# Altium PCB OLD_SDC-BSPD-rev2.PcbDoc (part 1 of 2)
Units mm, origin at the board's own origin, x right, y up, seen from the top; angles counter-clockwise.
Board outline 140.5 x 98.9 mm, 2 copper layers (Top Layer, Bottom Layer); 82 components, 50 nets, 263 pads, 54 vias.
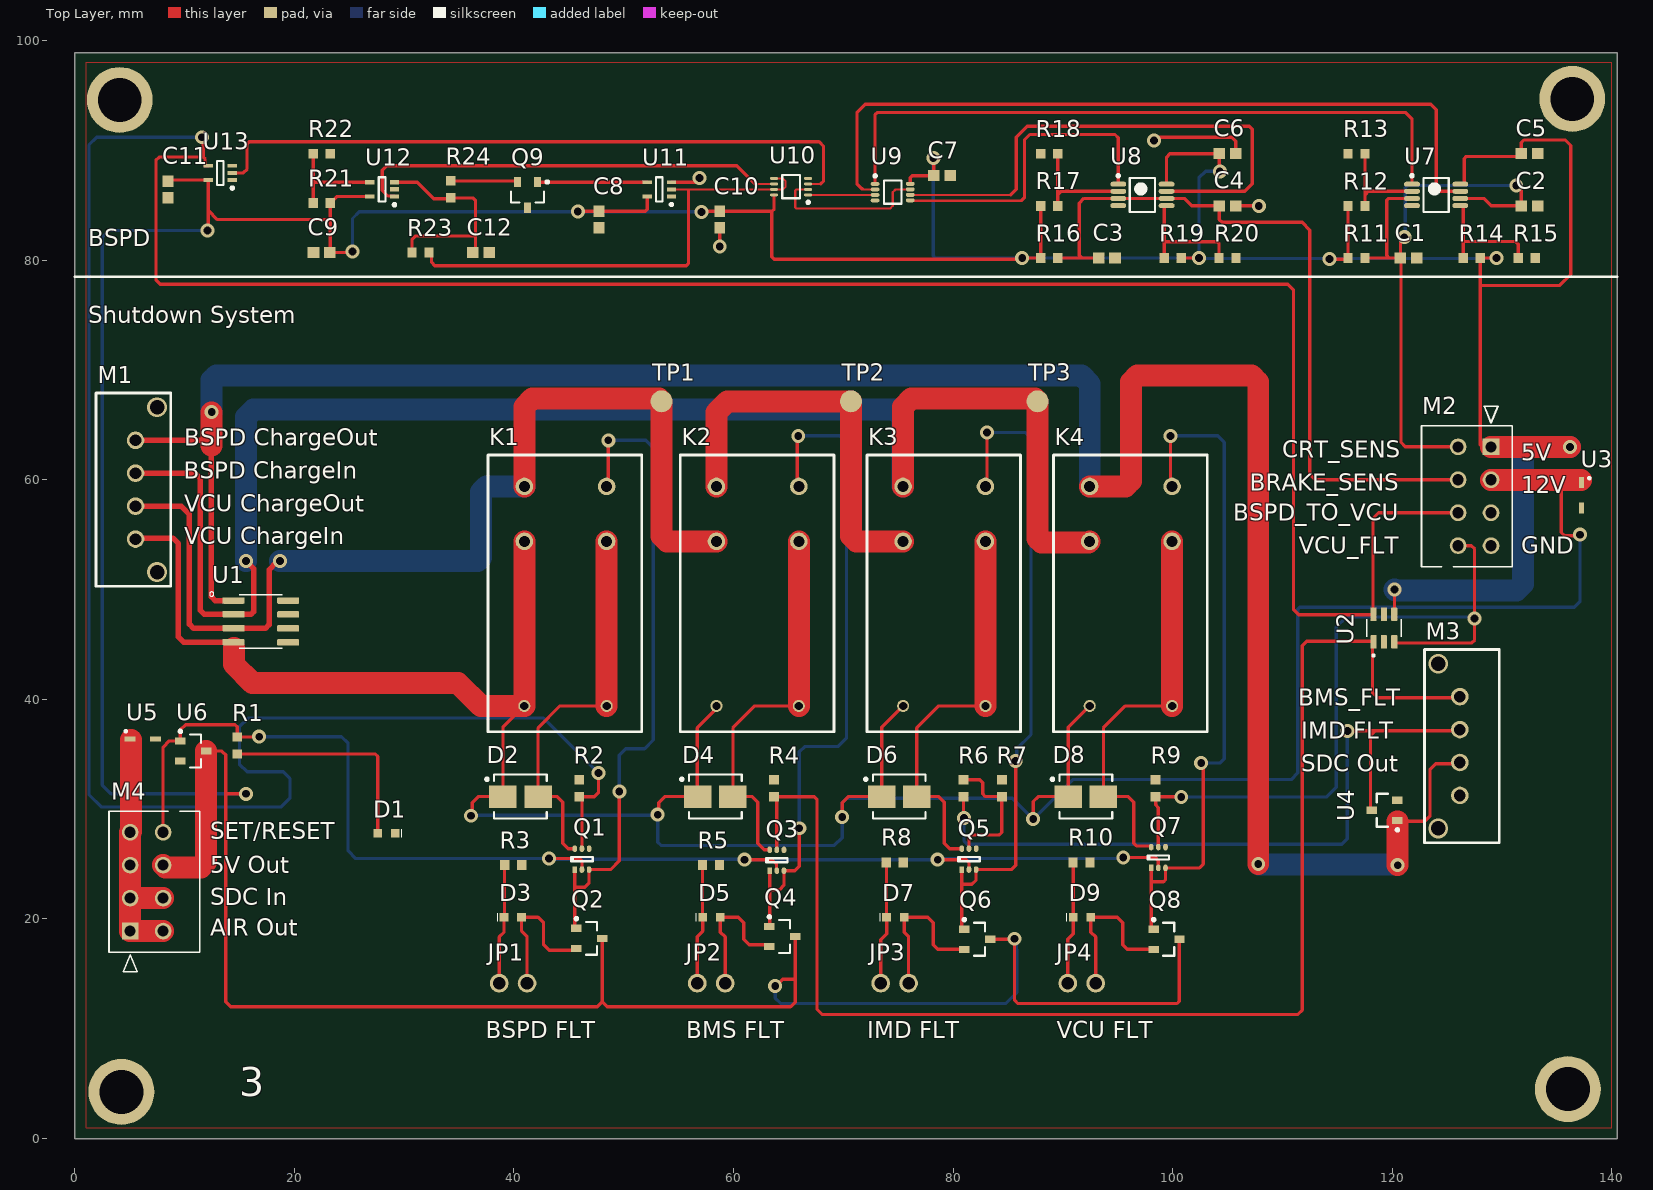
[diagram p0: Top Layer view]
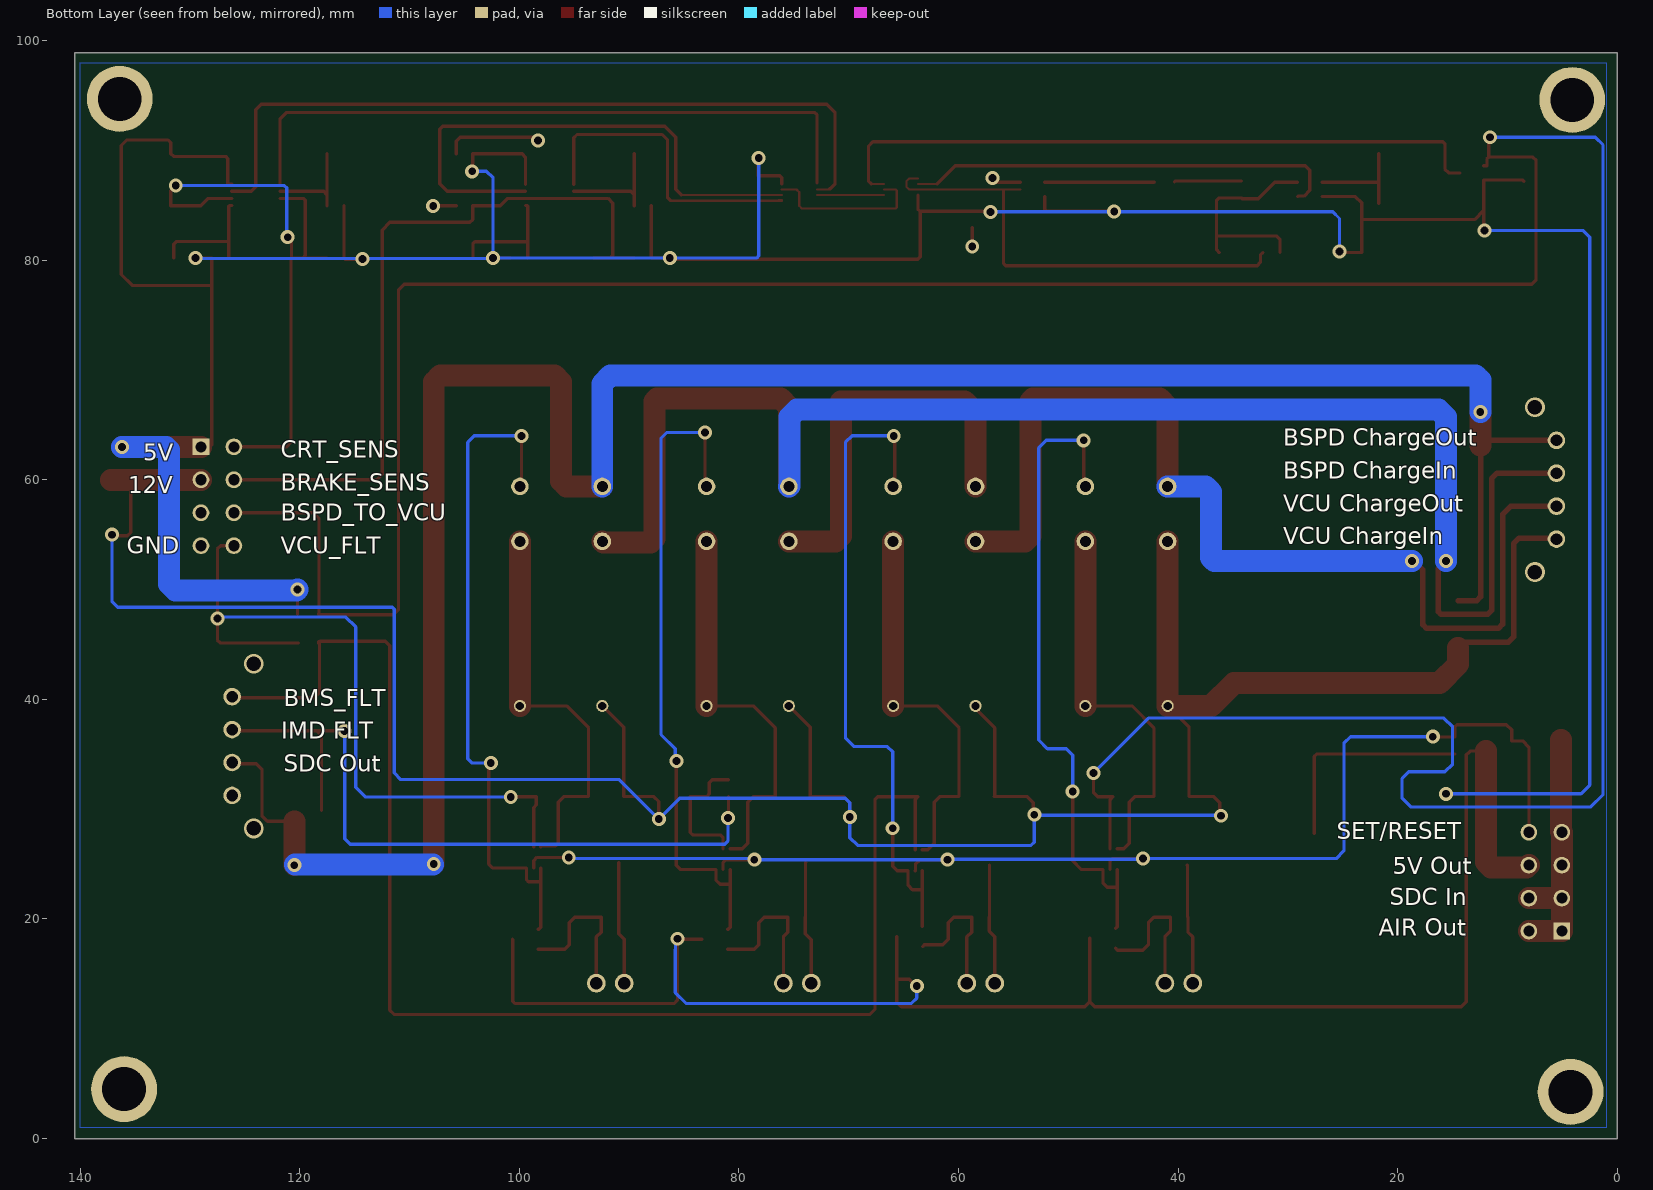
[diagram p1: Bottom Layer view, seen from below]
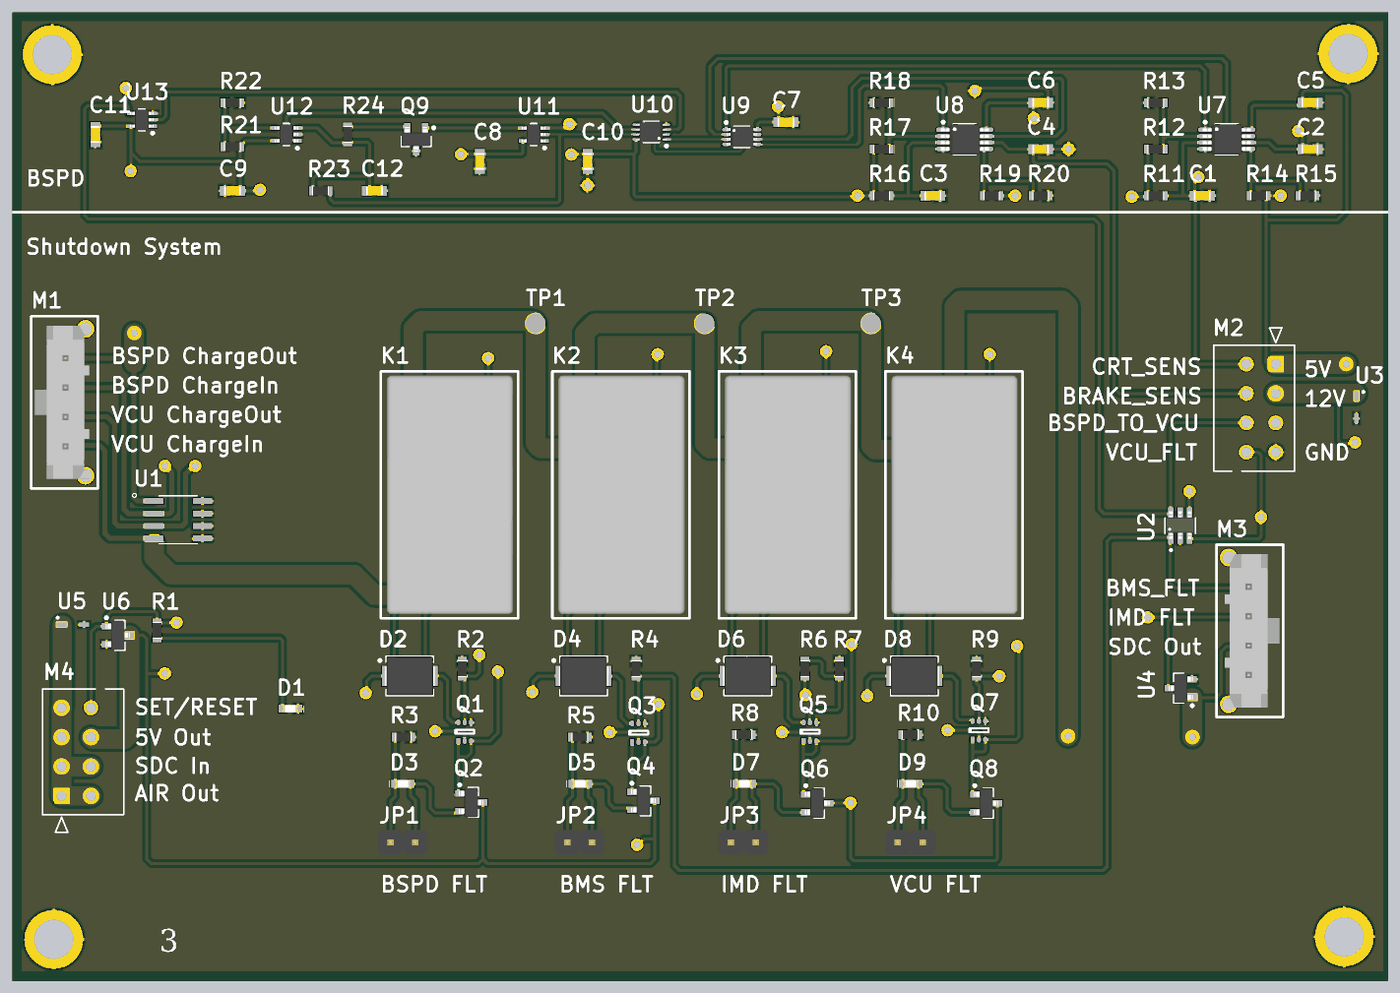
[diagram p2: 3D render of the assembled board from above, using the file's embedded part models]

## Layer stack, top to bottom
Top Solder: solder mask 0.0102, Solder Resist, Dk 3.5
Top Layer: signal copper 0.0356
Dielectric 1: dielectric 0.32, FR-4, Dk 4.8
Bottom Layer: signal copper 0.0356
Bottom Solder: solder mask 0.0102, Solder Resist, Dk 3.5

## Board outline
0,0 140.5,0 140.5,98.9 0,98.9

## Design rules (kind name [scope] priority, off if disabled: settings)
Clearance [All] p1: gap=0.1 ignorepadtopadclearanceinfootprint=FALSE except(0: Arc-Hole Track-Hole SMDPad-Hole THPad-Hole Via-Hole Fill-Hole Poly-Hole Region-Hole Text-Hole; 0.2: Arc-Arc Arc-Track Track-Track; 0.254: Text-Text; 0.3: Arc-Fill Arc-Poly Arc-Region Track-Fill Track-Poly Track-Region)
MinimumSolderMaskSliver [All] p1: minsoldermaskwidth=0.2
PolygonConnect [All] p1: connectstyle=Relief reliefconductorwidth=0.254 reliefentries=4 polygonreliefangle="90 Angle" airgapwidth=0.254
RoomDefinition SDC-rev2 [InComponentClass('SDC-rev2')] p1: confinementstyle=ConfineIn formatcopy=TRUE lockcomponents=FALSE outline -1.5,-4 143.5,-4 143.5,78.5 -1.5,78.5
RoomDefinition U_BSPD-rev2 [InComponentClass('U_BSPD-rev2')] p2: confinementstyle=ConfineIn formatcopy=TRUE lockcomponents=FALSE outline -2.3,79 144.2,79 144.2,103 -2.3,103
RoutingVias [All] p1: holewidth=0.45 width=0.75 viastyle="Through Hole" minholewidth=0.45 minwidth=0.75 maxholewidth=0.45 maxwidth=0.75
SolderMaskExpansion [All] p1: expansion=0.102 istentingtop=FALSE
Width [All] p1: maxlimit=2 minlimit=0.1 preferedwidth=0.3
29 further rules are at their usual default settings.

## Classes and differential pairs
component class U_BSPD-rev2: C1 C2 C3 C4 C5 C6 C7 C8 C9 C10 C11 C12 Q9 R11 R12 R13 R14 R15 R16 R17 R18 R19 R20 R21 R22 R23 R24 U7 U8 U9 U10 U11 U12 U13
component class SDC-rev2: D1 D2 D3 D4 D5 D6 D7 D8 D9 JP1 JP2 JP3 JP4 K1 K2 K3 K4 M1 M2 M3 M4 Q1 Q2 Q3 Q4 Q5 Q6 Q7 Q8 R1 R2 R3 R4 R5 R6 R7 R8 R9 R10 TP1 TP2 TP3 U1 U2 U4 U6

## Components (designator, comment, footprint, x,y, rotation, side; value= is the part's Value field where it differs from the comment)
C1 "100nF" CAP-0603 121.5,80.2 r180 top
C2 "100nF" CAP-0603 132.5,84.95 r180 top
C3 "100nF" CAP-0603 94,80.2 r180 top
C4 "100nF" CAP-0603 105,84.95 r180 top
C5 "100nF" CAP-0603 132.5,89.7 r180 top
C6 "100nF" CAP-0603 105,89.7 r180 top
C7 "100nF" CAP-0603 79,87.7 r0 top
C8 "100nF" CAP-0603 47.75,83.7 r90 top
C9 "100nF" CAP-0603 22.5,80.7 r180 top
C10 "100nF" CAP-0603 58.75,83.7 r90 top
C11 "100nF" CAP-0603 8.5,86.45 r90 top
C12 "15uF" CAP-0603 37,80.7 r180 top
D1 "Yellow" LED-0603 29.6,28.6 r180 top
D2 "100V" DO-214AA 40.6,31.15 r0 top
D3 "Red" LED-0603 38.7,19.35 r0 top
D4 "100V" DO-214AA 58.35,31.15 r0 top
D5 "Red" LED-0603 56.8,19.35 r0 top
D6 "100V" DO-214AA 75.1,31.15 r0 top
D7 "Red" LED-0603 73.55,19.35 r0 top
D8 "100V" DO-214AA 92.1,31.15 r0 top
D9 "Red" LED-0603 90.55,19.35 r0 top
JP1 "732-5315-ND" 2PIN-JP 41.2,14.15 r180 top
JP2 "732-5315-ND" 2PIN-JP 59.24,14.15 r180 top
JP3 "732-5315-ND" 2PIN-JP 75.95,14.15 r180 top
JP4 "732-5315-ND" 2PIN-JP 92.99,14.15 r180 top
K1 "5-1419124-6" "RELAY DPST SDC" 51.15,37.45 r90 top
K2 "5-1419124-6" "RELAY DPST SDC" 68.65,37.45 r90 top
K3 "5-1419124-6" "RELAY DPST SDC" 85.65,37.45 r90 top
K4 "5-1419124-6" "RELAY DPST SDC" 102.65,37.45 r90 top
M1 "0436500428" "4-PIN MOLEX" 5.45,59.1 r90 top
M2 "2068320802" "4X2-PIN MOLEX" 129,63 r90 top
M3 "0436500428" "4-PIN MOLEX" 126.25,35.75 r270 top
M4 "2068320802" "4X2-PIN MOLEX" 5.05,18.9 r270 top
Q1 "DMN63D1LDW" DMN63D1LDW 45.55,24.5 r90 top
Q2 "BSS84" SOT-23-3 46.875,18.235 r0 top
Q3 "DMN63D1LDW" DMN63D1LDW 63.3,24.4 r90 top
Q4 "BSS84" SOT-23-3 64.45,18.4 r0 top
Q5 "DMN63D1LDW" DMN63D1LDW 80.8,24.5 r90 top
Q6 "BSS84" SOT-23-3 82.2,18.15 r0 top
Q7 "DMN63D1LDW" DMN63D1LDW 98.05,24.65 r90 top
Q8 "BSS84" SOT-23-3 99.45,18.15 r0 top
Q9 "BSS138LT3G" SOT-23-3 41.25,85.95 r270 top
R1 "250" RES-0603 14.8,35.8 r270 top
R2 "10K" RES-0603 45.95,31.9 r90 top
R3 "240" RES-0603 39.95,24.9 r180 top
R4 "10K" RES-0603 63.7,31.9 r90 top
R5 "240" RES-0603 57.95,24.9 r180 top
R6 "1K" RES-0603 80.95,31.9 r90 top
R7 "1K" RES-0603 84.45,31.9 r90 top
R8 "240" RES-0603 74.7,25.15 r180 top
R9 "10K" RES-0603 98.45,31.9 r90 top
R10 "240" RES-0603 91.7,25.15 r180 top
R11 "10K" RES-0603 116.75,80.2 r180 top
R12 "1K" RES-0603 116.75,84.95 r180 top
R13 "3K" RES-0603 116.75,89.7 r0 top
R14 "9.1K" RES-0603 127.25,80.2 r0 top
R15 "3K" RES-0603 132.25,80.2 r180 top
R16 "10K" RES-0603 88.75,80.2 r180 top
R17 "1K" RES-0603 88.75,84.95 r180 top
R18 "9.1K" RES-0603 88.75,89.7 r0 top
R19 "7.5K" RES-0603 100,80.2 r0 top
R20 "3K" RES-0603 105,80.2 r180 top
R21 "1.3K" RES-0603 22.5,85.2 r0 top
R22 "2.2K" RES-0603 22.5,89.7 r180 top
R23 "33K" RES-0603 31.5,80.7 r180 top
R24 "499" RES-0603 34.25,86.45 r270 top
TP1 "Testpoint2" TP2 53.45,67.15 r0 top
TP2 "Testpoint2" TP2 70.7,67.15 r0 top
TP3 "Testpoint2" TP2 87.7,67.15 r0 top
U1 "SMDA12.TBT" SMDA12.TBT 16.95,47.1 r0 top
U2 "TPD4E1U06DBVR" TPD4E1U06DBVR 119.25,46.5 r90 top
U3 "AQ12C-01FTG" SOD323 137.25,58.6 r270 top
U4 "AQ12-02HTG" SOT-23-3 119.3,29.9 r180 top
U5 "AQ12C-01FTG" SOD323 6.2,36.4 r0 top
U6 "AQ05-02HTG" SOT-23-3 10.8,35.3 r0 top
U7 "TLV3202AIDGK" TLV3202AIDGK 124,85.95 r0 top
U8 "TLV3202AIDGK" TLV3202AIDGK 97.25,85.95 r0 top
U9 "NL27WZ32USGOSCT-ND" TSSOP50P310X90-8N 74.5,86.2 r0 top
U10 "SN74LVC2G08DCUT" SN74LVC2G08DCU 65.25,86.7 r180 top
U11 "SN74AHC1G04DCK" SN74AHC1G04DCK 53.25,86.45 r180 top
U12 "TLV3201AIDCKR" TLV3201AIDCK 28,86.45 r180 top
U13 "SN74AHC1G04DCK" SN74AHC1G04DCK 13.25,87.95 r180 top

## Footprints (in the part's own frame and the unit in brackets; to place one, negate y for a bottom-side part, rotate by r counter-clockwise, add the part's x,y. Pads: shape width x height; smd on the part's side, far side on the other; paste and mask are expansions set on the pad)
2PIN-JP [mm]
  round 1.7 hole 1.15: 1(0,0) 2(2.54,0)
  body extent -1.24,-1.27 3.84,1.27, height 8.57
"4-PIN MOLEX" [mm]
  round 1.6 hole 1.06: 1(-4.5,-0.09) 2(-1.5,-0.09) 3(1.5,-0.09) 4(4.5,-0.09)
  silkscreen extent -8.8,-3.3 8.8,3.5, body extent -7.82,-2.47 7.83,3.14, height 9.95
"4X2-PIN MOLEX" [mm]
  rect 1.52x1.52 hole 1.016 mask+0.076: 1(0,0)
  round 1.52 hole 1.016 mask+0.076: 2(-3,0) 3(-6,0) 4(-9,0) 5(0,3) 6(-3,3) 7(-6,3) 8(-9,3)
  silkscreen extent -10.92,-1.93 3.71,6.33, body extent 0,0 0.25,0.25, height 0.25
CAP-0603 [mm] "Chip Capacitor, 2-Leads, Body 1.60x0.80mm, IPC Medium Density"
  rect 1.05x1 smd: 1(-0.75,0) 2(0.75,0)
  body extent -0.87,-0.48 0.87,0.48, height 0.9
DMN63D1LDW [mm]
  rect 0.6x0.42 smd: 1(0,0)
  oval 0.6x0.42 smd: 2(0,-0.65) 3(0,-1.3) 4(1.9,-1.3) 5(1.9,-0.65) 6(1.9,0)
  silkscreen extent 0.76,-1.63 1.13,0.33
DO-214AA [mm] "Molded Diode, 2-Leads, Body 4.40x3.62mm, IPC Medium Density"
  rect 2.5x2.05 smd: 1(-1.6,0) 2(1.6,0)
  silkscreen extent -3.17,-2 2.4,2, body extent -2.6,-1.97 2.6,1.97, height 2.41
LED-0603 [mm]
  rect 0.8x0.8 smd: 1(2,0.8) 2(0.4,0.8)
  silkscreen extent -0.18,0.43 -0.18,1.17, body extent 0.4,0.4 2,1.2, height 0.7
"RELAY DPST SDC" [mm]
  round 1.1 hole 0.762: 1(1.95,2.7) 6(1.95,10.2)
  round 1.6 hole 1: 2(16.95,2.7) 3(21.95,2.7) 4(21.95,10.2) 5(16.95,10.2)
  silkscreen extent -0.4,-0.5 24.8,13.5, body extent 0,0 24.4,12.9, height 24.51
RES-0603 [mm] "Chip Resistor, 2-Leads, Body 1.60x0.80mm, IPC Medium Density"
  rect 0.85x0.9 smd: 1(-0.775,0) 2(0.775,0)
  body extent -0.85,-0.45 0.85,0.45, height 0.55
SMDA12.TBT [mm]
  rrect25% 1.98x0.59 smd: 1(-2.485,1.905) 2(-2.485,0.635) 3(-2.485,-0.635) 4(-2.485,-1.905) 5(2.485,-1.905) 6(2.485,-0.635) 7(2.485,0.635) 8(2.485,1.905)
  silkscreen extent -4.66,-2.45 1.95,2.69
SN74AHC1G04DCK [mm] "SOT23, 5-Leads, Body 2.00x2.10mm, Pitch 0.65mm, IPC Medium Density"
  rect 0.85x0.35 smd: 1(-1.1,0.65) 2(-1.1,0) 3(-1.1,-0.65) 4(1.1,-0.65) 5(1.1,0.65)
  silkscreen extent -1.23,-1.1 0.3,1.5, body extent -1.2,-1.07 1.2,1.07, height 1.1
SN74LVC2G08DCU [mm] "TSSOP, 8-Leads, Body 2.00x2.30mm, Pitch 0.50mm, IPC Medium Density"
  oval 0.75x0.25 smd: 1(-1.55,0.75) 2(-1.55,0.25) 3(-1.55,-0.25) 4(-1.55,-0.75) 5(1.55,-0.75) 6(1.55,-0.25) 7(1.55,0.25) 8(1.55,0.75)
  silkscreen extent -1.68,-1.05 0.8,1.55, body extent -1.55,-1.05 1.55,1.05, height 0.9
SOD323 [mm]
  rect 1x0.45 smd: 1(-1.15,0) 2(1.15,0)
  silkscreen extent -1.65,0.6 -1.45,0.8
SOT-23-3 [mm] "SOT23, 3-Leads, Body 2.90x2.40mm, Pitch 0.92mm, IPC Medium Density"
  rect 0.95x0.65 smd: 1(-1.175,0.915) 2(1.175,0) 3(-1.175,-0.915)
  silkscreen extent -1.3,-1.5 0.7,1.91, body extent -1.25,-1.5 1.25,1.5, height 1.1
TLV3201AIDCK [mm] "SOT23, 5-Leads, Body 2.00x2.10mm, Pitch 0.65mm, IPC Medium Density"
  rect 0.85x0.4 smd: 1(-1.125,0.65) 2(-1.125,0) 3(-1.125,-0.65) 4(1.125,-0.65) 5(1.125,0.65)
  silkscreen extent -1.25,-1.1 0.3,1.52, body extent -1.2,-1.07 1.2,1.07, height 1.1
TLV3202AIDGK [mm] "TSOP, 8-Leads, Body 3.00x3.00mm, Pitch 0.65mm, IPC Medium Density"
  oval 1.45x0.45 smd: 1(-2.2,0.975) 2(-2.2,0.325) 3(-2.2,-0.325) 4(-2.2,-0.975) 5(2.2,-0.975) 6(2.2,-0.325) 7(2.2,0.325) 8(2.2,0.975)
  silkscreen extent -2.32,-1.55 1.15,1.87, body extent -2.45,-1.55 2.45,1.55, height 1.1
TP2 [mm]
  round 2 smd: 1(0,0)
TPD4E1U06DBVR [mm]
  rrect25% 1.21x0.58 smd: 1(-1.255,0.95) 2(-1.255,0) 3(-1.255,-0.95) 4(1.255,-0.95) 5(1.255,0) 6(1.255,0.95)
  silkscreen extent -2.6,-1.56 0.8,1.56, body extent -1.35,-1.45 1.45,1.45, height 1.45
TSSOP50P310X90-8N [mm] "TSSOP, 8-Leads, Body 2.00x2.30mm, Pitch 0.50mm, IPC Medium Density"
  oval 0.8x0.35 smd: 1(-1.6,0.75) 2(-1.6,0.25) 3(-1.6,-0.25) 4(-1.6,-0.75) 5(1.6,-0.75) 6(1.6,-0.25) 7(1.6,0.25) 8(1.6,0.75)
  silkscreen extent -1.72,-1.05 0.8,1.6, body extent -1.55,-1.05 1.55,1.05, height 0.9

## Part data
C1 C2 C3 C4 C5 C6 C7 C8 C9 C10 C11: library part CL10B104KB8NNNL, "CAP CER 0.1UF 50V X7R 0603", Capacitance=10uF, Case Code (Imperial)=0805, Case Code (Metric)=2012, Dielectric=X5R, Manufacturer=Samsung, Manufacturer Part Number=CL21A106KPFNNNG, Max Operating Temperature=85°C, Min Operating Temperature=-55°C, Package Quantity=3000, Supplier Part Number 1=1276-6456-1-ND, Tolerance=10%, Voltage=10V, Case/Package=0805, ComponentLink1Description=http://www1.futureelectronics.com/doc/SAMSUNG/CL21A106KPFNNNG.pdf?src-supplier=Future+Electronics, ComponentLink1URL=http://www1.futureelectronics.com/doc/SAMSUNG/CL21A106KPFNNNG.pdf?src-supplier=Future+Electronics, ComponentLink2Description=https://www.verical.com/server-webapp/html/getDatasheet?partID=640497&src-supplier=Verical, ComponentLink2URL=https://www.verical.com/server-webapp/html/getDatasheet?partID=640497&src-supplier=Verical, Depth=1.25mm, Height=1.25mm, Lead Free="Lead Free", Length=2mm, Mount="Surface Mount", Packaging="Tape and Reel", Pricing 1="1=0.15, 10=0.104, 100=0.0489, 500=0.03428, 1000=0.02837 (USD)", Radiation Hardening=No, Stock 1=0, Supplier 1=Digi-Key, Termination=Wraparound, Thickness=0.053inch, Voltage Rating=10V, Width=0.049inch
C12: library part C1608X5R0J156M080AC, "CAP CER 15UF 6.3V X5R 0603"
D1: library part LED-Yellow, "LED YELLOW CLEAR 0603 SMD", Case Code (Imperial)=0603, Case Code (Metric)=1608, Forward Current=30mA, Forward Voltage=2V, Manufacturer="Wurth Electronics", Manufacturer Part Number=150060YS75000, Max Operating Temperature=85°C, Min Operating Temperature=-40°C, Package Quantity=4000, Supplier Part Number 1=732-4981-6-ND, Test Current=20mA, Case/Package=0603, Color=Yellow, ComponentLink1Description=http://katalog.we-online.de/led/datasheet/150060YS75000.pdf?src-supplier=Newark, ComponentLink1URL=http://katalog.we-online.de/led/datasheet/150060YS75000.pdf?src-supplier=Newark, ComponentLink2Description=https://katalog.we-online.de/led/datasheet/150060YS75000.pdf?src-supplier=Digi-Key, ComponentLink2URL=https://katalog.we-online.de/led/datasheet/150060YS75000.pdf?src-supplier=Digi-Key, ComponentLink3Description=http://www.farnell.com/datasheets/1911348.pdf?src-supplier=Element14, ComponentLink3URL=http://www.farnell.com/datasheets/1911348.pdf?src-supplier=Element14, ComponentLink4Description=https://www.distrelec.biz/Web/Downloads/_t/ds/150060YS75000_eng_tds.pdf?mime=application%2Fpdf&src-supplier=Distrelec, ComponentLink4URL=https://www.distrelec.biz/Web/Downloads/_t/ds/150060YS75000_eng_tds.pdf?mime=application%2Fpdf&src-supplier=Distrelec, ComponentLink5Description=http://www.produktinfo.conrad.com/datenblaetter/750000-774999/759432-da-01-en-CHIPLED_0603_W_KL_GELB_150060YS75000.pdf?src-supplier=Conrad, ComponentLink5URL=http://www.produktinfo.conrad.com/datenblaetter/750000-774999/759432-da-01-en-CHIPLED_0603_W_KL_GELB_150060YS75000.pdf?src-supplier=Conrad, Dominant Wavelength=590nm, Height=0.7mm, Length=1.6mm, Lens Style=Clear,Rectangular, Luminous Intensity=120mcd, Mount="Surface Mount", Packaging="Tape and Reel", Pricing 1="1=0.14, 50=0.133, 100=0.114, 500=0.099 (USD)", REACH SVHC=Unknown, Stock 1=78, Supplier 1=Digi-Key, Viewing Angle=140°, Wavelength=590nm, Width=0.8mm
D2 D4 D6 D8: library part Diode-600V-5A, "DIODE GEN PURP 600V 5A SMB", Average Rectified Current=5A, Case/Package=SMB, Manufacturer=MCC, Manufacturer Part Number=SK510B-LTP, Supplier Part Number 1=1655-1530-6-ND, ComponentLink1Description=http://components.arrow.com/part/dataview/49208388S301832N2022?src-supplier=Arrow, ComponentLink1URL=http://components.arrow.com/part/dataview/49208388S301832N2022?src-supplier=Arrow, ComponentLink2Description=http://www.mccsemi.com/up_pdf/SK52B-L-SK520B-L(DO-214AA).pdf?src-supplier=Digi-Key, ComponentLink2URL=http://www.mccsemi.com/up_pdf/SK52B-L-SK520B-L(DO-214AA).pdf?src-supplier=Digi-Key, ComponentLink3Description=http://www.smc-diodes.com/propdf/SD560B%20N1412%20REV.D.pdf?src-supplier=Digi-Key, ComponentLink3URL=http://www.smc-diodes.com/propdf/SD560B%20N1412%20REV.D.pdf?src-supplier=Digi-Key, Max Reverse Voltage (DC)=100V, Mount="Surface Mount", Number of Pins=2, Packaging="Tape and Reel", Pricing 1="1=0.4, 10=0.3, 25=0.2628, 100=0.1427, 250=0.14192, 500=0.11638, 1000=0.08634 (USD)", Stock 1=68219, Supplier 1=Digi-Key
D3 D5 D7 D9: library part LED-Red-Bright, "LED RED CLEAR 0603 SMD", Case Code (Imperial)=0603, Case Code (Metric)=1608, Forward Voltage=2.2V, Lens Color=Clear, Manufacturer=Inolux, Manufacturer Part Number=IN-S63ATR, Supplier Part Number 1=1830-1065-6-ND, Test Current=20mA, Case/Package=0603, Color=Red, ComponentLink1Description=http://www.inolux-corp.com/datasheet/SMDLED/Mono%20Color%20Top%20View/IN-S63AT%20Series_V1.1.pdf?src-supplier=Digi-Key, ComponentLink1URL=http://www.inolux-corp.com/datasheet/SMDLED/Mono%20Color%20Top%20View/IN-S63AT%20Series_V1.1.pdf?src-supplier=Digi-Key, Dominant Wavelength=622nm, Height=0.4mm, Length=1.6mm, Lens Size=0.8mm, Lens Style=Flat, Lens Transparency=Clear, Luminous Intensity=45mcd, Mount="Surface Mount", Packaging="Cut Tape", Pricing 1="1=0.33, 10=0.24, 100=0.1136, 500=0.07576, 1000=0.05934 (USD)", Stock 1=6977, Supplier 1=Digi-Key, Viewing Angle=120°, Width=0.8mm
JP1 JP2 JP3 JP4: library part 2PIN-TEST, "CONN HEADER VERT 2POS 2.54MM"
K1 K2 K3 K4: "General Purpose Relay, Osa Series, Power, Non Latching, Dpst-No, 12 Vdc, 3 A Rohs Compliant: Yes", Coil Current=45mA, Coil Power=600mW, Coil Resistance=270R, Coil Voltage (DC)=12V, Contact Current Rating=3A, Contact Voltage Rating (AC)=240V, Manufacturer="TE Connectivity", Max Operating Temperature=60°C, Min Operating Temperature=-30°C, Package Quantity=1000, Supplier Part Number 1=OSA-SS-212DM3,000-ND, Category=Relays, Coil Type=Non-Latching, ComponentLink1Description=http://www.farnell.com/datasheets/1652820.pdf?src-supplier=Farnell, ComponentLink1URL=http://www.farnell.com/datasheets/1652820.pdf?src-supplier=Farnell, ComponentLink2Description=http://www.farnell.com/cad/1652820.pdf?src-supplier=Element14, ComponentLink2URL=http://www.farnell.com/cad/1652820.pdf?src-supplier=Element14, ComponentLink3Description=http://www.te.com/commerce/DocumentDelivery/DDEController?Action=srchrtrv&DocNm=5-1419124-6&DocType=Customer+Drawing&DocLang=English&src-supplier=Digi-Key, ComponentLink3URL=http://www.te.com/commerce/DocumentDelivery/DDEController?Action=srchrtrv&DocNm=5-1419124-6&DocType=Customer+Drawing&DocLang=English&src-supplier=Digi-Key, Contact Material=Silver, ELV=Compliant, Height=0.976inch, Length=24.4mm, Manufacturer Part Number=5-1419124-6, Mount="Through Hole", Operate Time=20ms, Packaging=Box, Pricing 1="1=2.54, 10=2.385, 25=2.1204, 50=2.0142, 100=1.9083, 250=1.69624, 500=1.59022, 1000=1.48421, 5000=1.4312 (USD)", REACH SVHC=Unknown, Relay Type="General Purpose", Release Time=10ms, Stock 1=2593, Supplier 1=Digi-Key, Termination=PCB, Throw Configuration=DPST, Weight=13g, Width=12.9mm
M1 M3: "4 PIN HDR, 3MM PITCH, 18-30 AWG", Color=Black, Manufacturer=Molex, Max Operating Temperature=105°C, Min Operating Temperature=-40°C, Package Quantity=2040, Supplier Part Number 1=WM10669-ND, Category="Connectors, Interconnects", ComponentLink1Description=http://www.molex.com/pdm_docs/sd/436500428_sd.pdf?src-supplier=Digi-Key, ComponentLink1URL=http://www.molex.com/pdm_docs/sd/436500428_sd.pdf?src-supplier=Digi-Key, ComponentLink2Description=http://www.molex.com/webdocs/datasheets/pdf/en-us/0436500428_PCB_HEADERS.pdf?src-supplier=Avnet, ComponentLink2URL=http://www.molex.com/webdocs/datasheets/pdf/en-us/0436500428_PCB_HEADERS.pdf?src-supplier=Avnet, Connector Type="Male Pin", Contact Material=Brass, Contact Plating=Gold, Depth=5.57mm, Fastening Type=Ramp, Housing Material=Polymer, Length=15.65mm, Manufacturer Part Number=0436500428, Mount="Through Hole", Number of Contacts=4, Number of Ports=1, Number of Positions=4, Number of Rows=1, Number of Terminals=4, Orientation=Straight, Packaging=Tray, Pitch=3mm, Pricing 1="1=1.44, 10=1.265, 100=1.0916, 500=0.89316, 1000=0.79392, 5000=0.69468, 10000=0.65995 (USD)", Stock 1=1193, Supplier 1=Digi-Key, Termination=Solder
M2 M4: "4X2 PIN HDR, 3MM PITCH, 16-30 AWG", Built_By=Molex_Team, Copyright="Copyright (C) 2018 Accelerated Designs. All rights reserved", Manufacturer_Part_Number=2068320802, RefDes=RefDes, SourceLibrary=Molex_2020-09-22, Type=DEV, Vendor="Molex Connector Corporation"
Q1 Q3 Q5 Q7: "MOSFET 2N-CH 60V 0.25A SOT363", Case/Package=SOT-363, Continuous Drain Current (ID)=170mA, Drain to Source Voltage (Vdss)=60V, Input Capacitance=17pF, Manufacturer=Toshiba, Manufacturer Part Number=SSM6N7002CFU,LF, Max Power Dissipation=285mW, Supplier Part Number 1=SSM6N7002CFULFDKR-ND, Category="Discrete Semiconductor Products", ComponentLink1Description=https://toshiba.semicon-storage.com/info/docget.jsp?did=29875&prodName=SSM6N7002CFU&src-supplier=Digi-Key, ComponentLink1URL=https://toshiba.semicon-storage.com/info/docget.jsp?did=29875&prodName=SSM6N7002CFU&src-supplier=Digi-Key, ComponentLink2Description=http://www.mouser.com/ds/2/408/SSM6N7002CFU_datasheet_en_20150413-736631.pdf?src-supplier=Mouser, ComponentLink2URL=http://www.mouser.com/ds/2/408/SSM6N7002CFU_datasheet_en_20150413-736631.pdf?src-supplier=Mouser, FET Type="2 N-Channel", Mount="Surface Mount", Packaging="Tape and Reel", Pricing 1="1=0.27, 10=0.221, 100=0.0906, 500=0.0756, 1000=0.05253 (USD)", Rds On Max=3.9R, Stock 1=13946, Supplier 1=Digi-Key
Q2 Q4 Q6 Q8: "P Channel MOSFET, -130 mA, -50 V, 1.2 ohm, -5 V, -1.7 V"
Q9: "MOSFET N-CH 50V 200MA SOT-23", Case/Package=SOT-23-3, Continuous Drain Current (ID)=200mA, Drain to Source Breakdown Voltage=50V, Drain to Source Resistance=3.5R, Gate to Source Voltage (Vgs)=20V, Input Capacitance=50pF, Manufacturer="ON Semiconductor", Max Operating Temperature=150°C, Max Power Dissipation=225mW, Min Operating Temperature=-55°C, Package Quantity=1, Supplier Part Number 1=BSS138LT3GOSCT-ND, Threshold Voltage=500mV, ComponentLink1Description=DigiKey, ComponentLink1URL=https://www.digikey.ca/product-detail/en/BSS138LT3G/BSS138LT3GOSCT-ND/2120566/?itemSeq=274498102, Current Rating=200mA, Drain to Source Voltage (Vdss)=50V, Element Configuration=Single, Halogen Free="Halogen Free", Height=0.94mm, Lead Free="Lead Free", Length=2.9mm, Manufacturer Part Number=BSS138LT3G, Nominal Vgs=500mV, Number of Elements=1, Number of Pins=3, On-State Resistance=3.5R, Packaging="Tape and Reel", Power Dissipation=225mW, Pricing 1="1=0.45, 10=0.408, 100=0.2284, 500=0.12234, 1000=0.0832 (USD)", Radiation Hardening=No, Rds On Max=3.5R, REACH SVHC="No SVHC", Stock 1=195647, Supplier 1=Digi-Key, Turn-Off Delay Time=20ns, Turn-On Delay Time=20ns, Voltage Rating (DC)=50V, Width=1.3mm
R1 R2 R4 R9 R11 R16: library part CRCW060310K0FKEA, "RES SMD 10K OHM 1% 1/10W 0603", Case Code (Imperial)=0603, Case Code (Metric)=1608, Manufacturer=Vishay, Max Operating Temperature=155°C, Max Power Dissipation=100mW, Min Operating Temperature=-55°C, Package Quantity=10, Resistance=10kR, Supplier Part Number 1=541-10.0KHCT-ND, Temperature Coefficient=100ppm/°C, Tolerance=1%, Voltage Rating=75V, Case/Package=0603, Category=Resistors, ComponentLink1Description=http://www.vishay.com/docs/20008/dcrcw.pdf?src-supplier=Avnet+Europe, ComponentLink1URL=http://www.vishay.com/docs/20008/dcrcw.pdf?src-supplier=Avnet+Europe, ComponentLink2Description=https://www.verical.com/server-webapp/html/getDatasheet?partID=86831&src-supplier=Verical, ComponentLink2URL=https://www.verical.com/server-webapp/html/getDatasheet?partID=86831&src-supplier=Verical, ComponentLink3Description=http://www.farnell.com/datasheets/2310790.pdf?src-supplier=Allied+Electronics, ComponentLink3URL=http://www.farnell.com/datasheets/2310790.pdf?src-supplier=Allied+Electronics, ComponentLink4Description=http://www.vishay.com/docs/20035/dcrcwe3.pdf?src-supplier=Digi-Key, ComponentLink4URL=http://www.vishay.com/docs/20035/dcrcwe3.pdf?src-supplier=Digi-Key, ComponentLink5Description=http://www.farnell.com/datasheets/2310790.pdf?src-supplier=Mouser, ComponentLink5URL=http://www.farnell.com/datasheets/2310790.pdf?src-supplier=Mouser, ComponentLink6Description=http://www.farnell.com/datasheets/2310790.pdf?src-supplier=Element14, ComponentLink6URL=http://www.farnell.com/datasheets/2310790.pdf?src-supplier=Element14, ComponentLink7Description=http://www.farnell.com/datasheets/2310790.pdf?src-supplier=Avnet, ComponentLink7URL=http://www.farnell.com/datasheets/2310790.pdf?src-supplier=Avnet, ComponentLink8Description=http://www.vishay.com/docs/20035/dcrcwe3.pdf?src-supplier=Future+Electronics, ComponentLink8URL=http://www.vishay.com/docs/20035/dcrcwe3.pdf?src-supplier=Future+Electronics, ComponentLink9Description=http://uk.rs-online.com/webdocs/0d98/0900766b80d98afc.pdf?src-supplier=RSComponents, ComponentLink9URL=http://uk.rs-online.com/webdocs/0d98/0900766b80d98afc.pdf?src-supplier=RSComponents, ComponentLink10Description=http://www.farnell.com/datasheets/2310790.pdf?src-supplier=Distrelec, ComponentLink10URL=http://www.farnell.com/datasheets/2310790.pdf?src-supplier=Distrelec, Composition="Thick Film", Contact Plating=Tin,Lead, Depth=0.85mm, Features="Automotive AEC-Q200", Height=0.45mm, Lead Free="Lead Free", Length=1.55mm, Manufacturer Part Number=CRCW060310K0FKEA, Military Standard=Not, Number of Pins=2, Number of Terminations=2, Packaging="Tape and Reel", Power Rating=100mW, Pricing 1="1=0.1, 10=0.034, 100=0.0139, 1000=0.00623, 2500=0.0054 (USD)", Radiation Hardening=No, REACH SVHC=Unknown, Stock 1=1434373, Supplier 1=Digi-Key, Termination=SMD/SMT, Voltage Rating (DC)=75V, Weight=7.1E-05oz, Width=0.033inch
R3 R5 R8 R10: library part ESR03EZPJ241, "RES SMD 240 OHM 5% 1/4W 0603", Case Code (Imperial)=0603, Case Code (Metric)=1608, Manufacturer=Vishay, Manufacturer Part Number=CRCW0603220RJNEA, Max Operating Temperature=155°C, Max Power Dissipation=100mW, Min Operating Temperature=-55°C, Package Quantity=1, Resistance=220R, Supplier Part Number 1=541-220GCT-ND, Temperature Coefficient=200ppm/°C, Tolerance=5%, Voltage Rating=75V, Case/Package=0603, Category=Resistors, ComponentLink1Description=http://www.vishay.com/docs/20035/dcrcwe3.pdf?src-supplier=Digi-Key, ComponentLink1URL=http://www.vishay.com/docs/20035/dcrcwe3.pdf?src-supplier=Digi-Key, ComponentLink2Description=http://www.vishay.com/docs/20035/dcrcwe3.pdf?src-supplier=Avnet, ComponentLink2URL=http://www.vishay.com/docs/20035/dcrcwe3.pdf?src-supplier=Avnet, ComponentLink3Description=http://www.alliedelec.com/m/d/0c934d6939ccefa68dbe0b96d821c8cf.pdf?src-supplier=Allied+Electronics, ComponentLink3URL=http://www.alliedelec.com/m/d/0c934d6939ccefa68dbe0b96d821c8cf.pdf?src-supplier=Allied+Electronics, ComponentLink4Description=http://www.farnell.com/datasheets/2045673.pdf?src-supplier=Element14, ComponentLink4URL=http://www.farnell.com/datasheets/2045673.pdf?src-supplier=Element14, ComponentLink5Description=http://www.mouser.com/ds/2/427/dcrcwe3-109170.pdf?src-supplier=Mouser, ComponentLink5URL=http://www.mouser.com/ds/2/427/dcrcwe3-109170.pdf?src-supplier=Mouser, Composition="Thick Film", Contact Plating=Tin, Depth=0.85mm, Features="Automotive AEC-Q200", Height=0.45mm, Length=1.55mm, Military Standard=Not, Mount="Surface Mount", Number of Terminations=2, Packaging="Tape and Reel", Power Rating=100mW, Pricing 1="1=0.1, 10=0.031, 100=0.0125, 1000=0.00562, 2500=0.00488 (USD)", Radiation Hardening=No, REACH SVHC=Unknown, Stock 1=171552, Supplier 1=Digi-Key, Termination=SMD/SMT, Weight=7.1E-05oz, Width=0.033inch, Working Voltage=75V
R6 R7 R12 R17: library part CRCW06031K00FKEA, "RES SMD 1K OHM 1% 1/10W 0603", Case Code (Imperial)=0603, Case Code (Metric)=1608, Manufacturer="Vishay Dale", Max Operating Temperature=155°C, Max Power Dissipation=100mW, Min Operating Temperature=-55°C, Package Quantity=10, Resistance=1kR, Supplier Part Number 1=541-1.00KHCT-ND, Temperature Coefficient=100ppm/°C, Tolerance=1%, Voltage Rating=75V, Case/Package=0603, Category=Resistors, ComponentLink1Description=http://www.vishay.com/docs/20035/dcrcwe3.pdf?src-supplier=Digi-Key, ComponentLink1URL=http://www.vishay.com/docs/20035/dcrcwe3.pdf?src-supplier=Digi-Key, ComponentLink2Description=http://uk.rs-online.com/webdocs/0d98/0900766b80d98afc.pdf?src-supplier=RSComponents, ComponentLink2URL=http://uk.rs-online.com/webdocs/0d98/0900766b80d98afc.pdf?src-supplier=RSComponents, ComponentLink3Description=http://www.vishay.com/docs/20035/dcrcwe3.pdf?src-supplier=Avnet, ComponentLink3URL=http://www.vishay.com/docs/20035/dcrcwe3.pdf?src-supplier=Avnet, ComponentLink4Description=http://www.vishay.com/docs/20035/dcrcwe3.pdf?src-supplier=Avnet+Asia, ComponentLink4URL=http://www.vishay.com/docs/20035/dcrcwe3.pdf?src-supplier=Avnet+Asia, ComponentLink5Description=http://www.farnell.com/datasheets/2310790.pdf?src-supplier=Element14, ComponentLink5URL=http://www.farnell.com/datasheets/2310790.pdf?src-supplier=Element14, ComponentLink6Description=https://www.distrelec.biz/Web/Downloads/a_/en/flD-CRCW-e3_data_en.pdf?mime=application%2Fpdf&src-supplier=Distrelec, ComponentLink6URL=https://www.distrelec.biz/Web/Downloads/a_/en/flD-CRCW-e3_data_en.pdf?mime=application%2Fpdf&src-supplier=Distrelec, ComponentLink7Description=http://www.vishay.com/docs/20035/dcrcwe3.pdf?src-supplier=Future+Electronics, ComponentLink7URL=http://www.vishay.com/docs/20035/dcrcwe3.pdf?src-supplier=Future+Electronics, ComponentLink8Description=http://www.vishay.com/docs/20035/dcrcwe3.pdf?src-supplier=Avnet+Europe, ComponentLink8URL=http://www.vishay.com/docs/20035/dcrcwe3.pdf?src-supplier=Avnet+Europe, Composition="Thick Film", Contact Plating=Tin, Depth=0.85mm, Features="Automotive AEC-Q200", Height=0.45mm, Lead Free="Lead Free", Length=1.55mm, Manufacturer Part Number=CRCW06031K00FKEA, Military Standard=Not, Mount="Surface Mount", Number of Pins=2, Number of Terminations=2, Packaging="Tape and Reel", Power Rating=100mW, Pricing 1="1=0.1, 10=0.034, 100=0.0139, 1000=0.00623, 2500=0.0054 (USD)", Radiation Hardening=No, REACH SVHC=Unknown, Stock 1=1811474, Supplier 1=Digi-Key, Termination=SMD/SMT, Voltage Rating (DC)=75V, Weight=7.1E-05oz, Width=0.033inch
R13 R15 R20: library part RMCF0603JT3K00, "RES 3K OHM 5% 1/10W 0603"
R14 R18: library part RMCF0603FT9K10, "RES 9.1K OHM 1% 1/10W 0603"
R19: library part RNCP0603FTD7K50, "RES 7.5K OHM 1% 1/8W 0603"
R21: library part MCT06030C1301FP500, "RES SMD 1.3K OHM 1% 1/8W 0603"
R22: library part RC0603FR-072K2L, "RES SMD 2.2K OHM 1% 1/10W 0603"
R23: library part RC0603FR-0733KL, "RES SMD 33K OHM 1% 1/10W 0603"
R24: library part ERA-3AEB4990V, "RES SMD 499 OHM 0.1% 1/10W 0603"
TP1 TP2 TP3: "Single layer pad TP"
U1: "TVS DIODE 12V 24V 8SO, quad-channel"
U2: "Quad-channel high-speed ESD protection device, 5.5V, 6-SOT-23"
U3 U5: "TVS DIODE 12V 23V SOD323"
U4: "TVS DIODE ARRAY 12VWM SOT23-3"
U6: "TVS DIODE ARRAY 5VWM SOT23-3"
U7 U8: "IC COMPAR PWR RRI DL PP 8VSSOP", Case/Package=VSSOP, Input Bias Current=50pA, Input Offset Voltage (Vos)=5mV, Manufacturer="Texas Instruments", Max Operating Temperature=125°C, Max Supply Current=40uA, Max Supply Voltage=5.5V, Min Operating Temperature=-40°C, Min Supply Voltage=2.7V, Nominal Supply Current=50uA, Package Quantity=80, Power Supply Rejection Ratio (PSRR)=85dB, Supplier Part Number 1=296-34992-ND, Common Mode Rejection Ratio=70dB, ComponentLink1Description=digikey.ca, ComponentLink1URL=https://www.digikey.ca/product-detail/en/texas-instruments/TLV3202AIDGK/296-34992-ND/3588984, ComponentLink2Description=https://datasheet.ciiva.com/12288/tlv3202-193866-12288098.pdf, ComponentLink2URL=https://datasheet.ciiva.com/12288/tlv3202-193866-12288098.pdf, ComponentLink3Description=https://datasheet.ciiva.com/23702/1645741-23702136.pdf, ComponentLink3URL=https://datasheet.ciiva.com/23702/1645741-23702136.pdf, ComponentLink4Description=https://datasheet.ciiva.com/8066/1645741-8066013.pdf, ComponentLink4URL=https://datasheet.ciiva.com/8066/1645741-8066013.pdf, Height=0.95mm, Hysteresis=1.2mV, Lead Free="Lead Free", Length=3.1mm, Manufacturer Part Number=TLV3202AIDGK, Max Input Current=50pA, Mount="Surface Mount", Number of Channels=2, Number of Elements=2, Number of Pins=8, Packaging=Rail/Tube, Pricing 1="1=1.77, 80=1.5, 160=1.278, 560=1.05, 1040=0.87 (USD)", Propagation Delay=50ns, Quiescent Current=50uA, Radiation Hardening=No, REACH SVHC="No SVHC", Response Time=0.047us, Stock 1=14534, Supplier 1=Digi-Key, Supplier 2=Digi-Key, Type="General Purpose", Width=3.1mm
U9: library part "OR GATE", "IC GATE OR 2CH 2-INP US8", High Level Output Current=-32mA, Low Level Output Current=32mA, Manufacturer="ON Semiconductor", Manufacturer Part Number=NL27WZ32USG, Max Operating Temperature=85°C, Max Supply Voltage=5.5V, Min Operating Temperature=-40°C, Min Supply Voltage=1.65V, Operating Supply Voltage=3.25V, Output Current=50mA, Package Quantity=1, Quiescent Current=1uA, ComponentLink1Description=https://datasheet.ciiva.com/8277/nl27wz32-d-8277742.pdf?src-supplier=Avnet, ComponentLink1URL=https://datasheet.ciiva.com/8277/nl27wz32-d-8277742.pdf?src-supplier=Avnet, ComponentLink2Description=https://datasheet.ciiva.com/4820/nl27wz32-d-114831-4820790.pdf?src-supplier=Mouser, ComponentLink2URL=https://datasheet.ciiva.com/4820/nl27wz32-d-114831-4820790.pdf?src-supplier=Mouser, ComponentLink3Description=https://datasheet.ciiva.com/15090/getdatasheetpartid-69948-15090488.pdf?src-supplier=Verical, ComponentLink3URL=https://datasheet.ciiva.com/15090/getdatasheetpartid-69948-15090488.pdf?src-supplier=Verical, ComponentLink4Description=https://datasheet.ciiva.com/26864/nl27wz32usg-26864780.pdf?src-supplier=IIIC, ComponentLink4URL=https://datasheet.ciiva.com/26864/nl27wz32usg-26864780.pdf?src-supplier=IIIC, ComponentLink5Description=https://datasheet.ciiva.com/1872/nl27wz32-d-1872823.pdf?src-supplier=Digi-Key, ComponentLink5URL=https://datasheet.ciiva.com/1872/nl27wz32-d-1872823.pdf?src-supplier=Digi-Key, ComponentLink6Description=https://datasheet.ciiva.com/26049/nl27wz32-d-26049116.pdf?src-supplier=Avnet+Europe, ComponentLink6URL=https://datasheet.ciiva.com/26049/nl27wz32-d-26049116.pdf?src-supplier=Avnet+Europe, ComponentLink7Description=https://datasheet.ciiva.com/1872/nl27wz32-d-1872824.pdf?src-supplier=Digi-Key, ComponentLink7URL=https://datasheet.ciiva.com/1872/nl27wz32-d-1872824.pdf?src-supplier=Digi-Key, ComponentLink8Description=https://datasheet.ciiva.com/1872/nl27wz32-d-1872825.pdf?src-supplier=Digi-Key, ComponentLink8URL=https://datasheet.ciiva.com/1872/nl27wz32-d-1872825.pdf?src-supplier=Digi-Key, ComponentLink9Description=https://datasheet.ciiva.com/16471/nl27wz32-d-16471564.pdf?src-supplier=Future+Electronics, ComponentLink9URL=https://datasheet.ciiva.com/16471/nl27wz32-d-16471564.pdf?src-supplier=Future+Electronics, Contact Plating=Tin,Matte, Halogen Free="Halogen Free", Height=0.8mm, Lead Free="Lead Free", Length=2.4mm, Logic Function=OR, Mount="Surface Mount", Number of Circuits=2, Number of Elements=2, Number of Gates=2, Number of Inputs=2, Number of Outputs=1, Number of Pins=8, Packaging="Tape and Reel", Pricing 1="1=0.39000, 10=0.31700, 25=0.29000, 100=0.21570, 250=0.19548, 500=0.16176, 1000=0.12132 (USD)", Propagation Delay=6.2ns, Radiation Hardening=No, REACH SVHC="No SVHC", RoHS=Yes, Schmitt Trigger Input=No, Stock 1=5684, Supplier 1=Digi-Key, Supplier Part Number 1=NL27WZ32USGOSCT-ND, Turn-On Delay Time=5.2ns, Width=2.1mm
U10: "Dual 2-Input Positive-AND Gate", Case/Package=VSSOP, High Level Output Current=-32mA, Low Level Output Current=32mA, Manufacturer="Texas Instruments", Max Operating Temperature=125°C, Max Supply Voltage=5.5V, Min Operating Temperature=-40°C, Min Supply Voltage=1.65V, Package Quantity=1, Quiescent Current=10uA, Supplier Part Number 1=296-26615-1-ND, ComponentLink1Description=Digi-Key, ComponentLink1URL=https://www.digikey.ca/product-detail/en/texas-instruments/SN74LVC2G08DCUT/296-26615-1-ND/2255073, ComponentLink2Description=http://focus.ti.com/lit/ds/symlink/sn74lvc2g08.pdf?src-supplier=Element14, ComponentLink2URL=http://focus.ti.com/lit/ds/symlink/sn74lvc2g08.pdf?src-supplier=Element14, ComponentLink3Description=http://focus.ti.com/lit/ds/symlink/sn74lvc2g08.pdf?src-supplier=Avnet, ComponentLink3URL=http://focus.ti.com/lit/ds/symlink/sn74lvc2g08.pdf?src-supplier=Avnet, ComponentLink4Description=http://www.ti.com/general/docs/lit/getliterature.tsp?genericPartNumber=SN74LVC2G08&&fileType=pdf&src-supplier=Avnet, ComponentLink4URL=http://www.ti.com/general/docs/lit/getliterature.tsp?genericPartNumber=SN74LVC2G08&&fileType=pdf&src-supplier=Avnet, ComponentLink5Description=https://www.verical.com/server-webapp/html/getDatasheet?partID=48823&src-supplier=Verical, ComponentLink5URL=https://www.verical.com/server-webapp/html/getDatasheet?partID=48823&src-supplier=Verical, ComponentLink6Description=http://www.farnell.com/datasheets/1834894.pdf?src-supplier=Element14, ComponentLink6URL=http://www.farnell.com/datasheets/1834894.pdf?src-supplier=Element14, ComponentLink7Description=http://www.ti.com/lit/ds/symlink/sn74lvc2g08.pdf?src-supplier=Digi-Key, ComponentLink7URL=http://www.ti.com/lit/ds/symlink/sn74lvc2g08.pdf?src-supplier=Digi-Key, ComponentLink8Description=http://www.produktinfo.conrad.com/datenblaetter/1000000-1099999/001017175-da-01-en-IC_DU_2IN_PO_SN74LVC2G08DCUT_VSSOP_8_TID.pdf?src-supplier=Conrad, ComponentLink8URL=http://www.produktinfo.conrad.com/datenblaetter/1000000-1099999/001017175-da-01-en-IC_DU_2IN_PO_SN74LVC2G08DCUT_VSSOP_8_TID.pdf?src-supplier=Conrad, Contact Plating=Gold, Lead Free="Lead Free", Logic Function=AND, Manufacturer Part Number=SN74LVC2G08DCUT, Max Output Current=32mA, Mount="Surface Mount", Number of Bits=2, Number of Circuits=2, Number of Elements=2, Number of Gates=2, Number of Input Lines=2, Number of Inputs=2, Number of Output Lines=1, Number of Outputs=1, Number of Pins=8, Output Current=32mA, Packaging="Tape and Reel", Pricing 1="1=0.86, 10=0.769, 100=0.5994 (USD)", Propagation Delay=3.8ns, Radiation Hardening=No, REACH SVHC="No SVHC", Stock 1=2440, Supplier 1=Digi-Key, Termination=SMD/SMT, Turn-On Delay Time=3.8ns, Weight=0.000339oz
U11 U13: "The SN74AHC1G04 contains one inverter gate. The / device performs the Boolean function Y = A bar.", Case/Package=SC, High Level Output Current=-8mA, Low Level Output Current=8mA, Manufacturer="Texas Instruments", Manufacturer Part Number=SN74AHC1G04DCKR, Max Operating Temperature=125°C, Max Supply Voltage=5.5V, Min Operating Temperature=-40°C, Min Supply Voltage=2V, Package Quantity=1, Quiescent Current=1uA, Supplier Part Number 1=296-1090-1-ND, ComponentLink1Description=Digi-Key, ComponentLink1URL=https://www.digikey.com/product-detail/en/texas-instruments/SN74AHC1G04DCKR/296-1090-1-ND/276358, ComponentLink2Description=http://www.farnell.com/datasheets/1759812.pdf?src-supplier=Element14, ComponentLink2URL=http://www.farnell.com/datasheets/1759812.pdf?src-supplier=Element14, ComponentLink3Description=http://www.jameco.com/Jameco/Products/ProdDS/912915.pdf?src-supplier=Jameco, ComponentLink3URL=http://www.jameco.com/Jameco/Products/ProdDS/912915.pdf?src-supplier=Jameco, ComponentLink4Description=http://www.ti.com/lit/ds/symlink/sn74ahc1g04.pdf?src-supplier=Digi-Key, ComponentLink4URL=http://www.ti.com/lit/ds/symlink/sn74ahc1g04.pdf?src-supplier=Digi-Key, ComponentLink5Description=https://www.verical.com/server-webapp/html/getDatasheet?partID=53378&src-supplier=Verical, ComponentLink5URL=https://www.verical.com/server-webapp/html/getDatasheet?partID=53378&src-supplier=Verical, ComponentLink6Description=http://www.farnell.com/datasheets/2024272.pdf?src-supplier=Element14, ComponentLink6URL=http://www.farnell.com/datasheets/2024272.pdf?src-supplier=Element14, ComponentLink7Description=http://www.ti.com/general/docs/lit/getliterature.tsp?genericPartNumber=SN74AHC1G04&amp;&amp;fileType=pdf&src-supplier=Avnet+Asia, ComponentLink7URL=http://www.ti.com/general/docs/lit/getliterature.tsp?genericPartNumber=SN74AHC1G04&amp;&amp;fileType=pdf&src-supplier=Avnet+Asia, Contact Plating=Gold, Height=0.9mm, Lead Free="Lead Free", Length=2mm, Logic Function=Buffer,Inverter,Inverting, Max Output Current=8mA, Mount="Surface Mount", Number of Bits=1, Number of Circuits=1, Number of Elements=1, Number of Gates=1, Number of Inputs=1, Number of Pins=5, Output Current=8mA, Packaging="Tape and Reel", Pricing 1="1=0.43, 10=0.32, 100=0.1996, 500=0.13658, 1000=0.10506 (USD)", Propagation Delay=12ns, Radiation Hardening=No, REACH SVHC="No SVHC", Schmitt Trigger Input=No, Stock 1=120362, Supplier 1=Digi-Key, Termination=SMD/SMT, Turn-On Delay Time=10.6ns, Weight=8.8E-05oz, Width=1.25mm
U12: "Comparator Single R-R I/P 5.5V 5-Pin SC-70 T/R", Case/Package=SOT-23-5, Input Bias Current=5nA, Input Offset Voltage (Vos)=5mV, Manufacturer="Texas Instruments", Max Operating Temperature=125°C, Max Supply Current=40uA, Max Supply Voltage=5.5V, Min Operating Temperature=-40°C, Min Supply Voltage=2.7V, Nominal Supply Current=50uA, Package Quantity=3000, Power Supply Rejection Ratio (PSRR)=85dB, Supplier Part Number 1=296-36751-1-ND, Common Mode Rejection Ratio=85dB, ComponentLink1Description=https://datasheet.ciiva.com/29635/tlv3201-29635045.pdf?src-supplier=Digi-Key, ComponentLink1URL=https://datasheet.ciiva.com/29635/tlv3201-29635045.pdf?src-supplier=Digi-Key, ComponentLink2Description=https://datasheet.ciiva.com/2966/tlv3202-2966812.pdf?src-supplier=Avnet, ComponentLink2URL=https://datasheet.ciiva.com/2966/tlv3202-2966812.pdf?src-supplier=Avnet, Hysteresis=1.2mV, Lead Free="Lead Free", Manufacturer Part Number=TLV3201AIDCKR, Max Input Current=5nA, Mount="Surface Mount", Number of Channels=1, Number of Elements=1, Number of Pins=5, Packaging="Tape and Reel", Pricing 1="1=1.36000, 10=1.21500, 100=0.94760, 500=0.78280, 1000=0.61800 (USD)", Propagation Delay=50ns, Quiescent Current=40uA, Radiation Hardening=No, Response Time=0.047us, RoHS=Yes, Stock 1=34988, Supplier 1=Digi-Key, Type="General Purpose"

## Free pads (board coordinates)
  round 6 hole 4: ""(4.1,94.6) ""(4.25,4.25) ""(136,4.5) ""(136.4,94.7)

## Via types
v1: diameter 1.27, hole 0.711, Top Layer to Bottom Layer, 50 vias
v2: diameter 1.8, hole 1.32, Top Layer to Bottom Layer, 4 vias

## Nets (pads, with @x,y where several pads share a name; then routed paths per layer and width w, separated by ;. In a path a pad name is that pad's centre, name@x,y a point inside that pad or via, vN(x,y) a via of type N, cw(c..) or ccw(c..) an arc to the next point about the centre after c; other vN are vias at no path point)
5V: C5.2 C6.2 C7.1 C8.2 C9.1 C10.2 C11.2 M2.1 M4.7 Q2.2 Q4.2 Q6.2 Q8.2 R11.2 R12.2 R14.2 R16.2 R17.2 R19.2 R21.2 U2.4 U6.2 U7.8 U8.8 U9.8 U10.8 U11.5 U12.5 U13.5 | length 534
  Top Layer w0.3: C11.2 8.6,87.3 U13.5 12.15,84.55 ; U6.2 13.4,35.3 13.499,35.201 13.75,34.95 13.75,31.4 ; v1@12.2,82.9 12.15,82.95 12.15,84.55 ; v1(15.6,31.4) 13.75,31.4 ; v1@25.1,80.7 C9.1 23.275,80.725 23.275,83.7 ; U12.5 23.85,85.8 23.275,85.225 R21.2 23.275,83.7 ; v1@45.8,84.4 v1(45.825,84.425) 45.85,84.45 C8.2 51.974,84.45 52.15,84.626 U11.5 ; Q2.2 48.05,12.45 ; v1(57.1,84.4) 57.15,84.45 C10.2 63.5,84.45 ; U10.8@63.7,85.921 63.7,84.65 63.5,84.45 ; v1@64.1,14.1 64.5,14.5 65.625,14.5 ; Q4.2 65.625,14.5 ; U9.8 76.1,87.524 76.276,87.7 C7.1 78.25,89.25 v1(78.2,89.3) ; Q6.2 85.55,18.15 v1(85.6,18.2) 85.6,12.6 85.9,12.3 100.4,12.3 100.6,12.5 100.6,18.125 Q8.2 ; v1(86.3,80.2) 86.2,80.1 63.7,80.1 63.5,80.3 63.5,84.45 ; v1@86.7,80.2 R16.2 R17.2 ; U8.8 99.45,89.4 99.75,89.7 C6.2 104.25,88.15 v1(104.3,88.1) ; R19.2 v1(102.4,80.2) ; v1(114.3,80.1) 115.875,80.1 R11.2 R12.2 ; U2.4 v1(120.2,50) ; U7.8 126.481,86.925 126.55,86.994 126.55,89.25 126.75,89.45 131.5,89.45 C5.2 131.75,90.7 132,90.95 135.75,90.95 136.25,90.45 136.25,78.7 135.25,77.7 128.025,77.7 ; M2.1 128.824,63.176 128.025,63.176 128.025,77.7 ; v1(129.5,80.2) R14.2 128.025,77.7 ; 12.15,84.55 13,83.7 23.275,83.7 ; 13.75,31.4 13.75,12.45 14.2,12 47.6,12 48.05,12.45 ; 48.05,12.45 48.5,12 65.2,12 65.625,12.425 65.625,14.5
  Top Layer w2: M4.7 8.25,24.7 11.5,24.7 11.975,25.175 U6.2 ; M2.1 v1(136.2,63)
  Bottom Layer w0.3: v1(12.1,82.7) 3.1,82.7 2.5,82.1 2.5,32.2 3.3,31.4 v1(15.6,31.4) ; v1(25.3,80.8) 25.3,83.8 25.925,84.425 v1(45.825,84.425) 45.838,84.412 57.088,84.412 v1(57.1,84.4) ; v1(63.8,13.9) 63.8,12.8 64.3,12.3 84.8,12.3 85.8,13.3 85.8,17.2 85.786,17.214 85.786,18.014 v1(85.6,18.2) ; v1(78.2,89.3) 78.2,80.4 78.4,80.2 v1(86.3,80.2) v1(102.4,80.2) ; v1(104.3,88.1) 103,88.1 102.4,87.5 v1(102.4,80.2) ; v1(129.5,80.2) 129.45,80.15 114.35,80.15 v1(114.3,80.1) 114.25,80.15 102.45,80.15 v1(102.4,80.2)
  Bottom Layer w2: v1(120.2,50) 120.3,49.9 131.3,49.9 131.9,50.5 131.9,62.7 132.2,63 v1(136.2,63)
12V: D2.1 D4.1 D6.1 D8.1 K1.5 K1.6 K2.6 K3.6 K4.6 M1.1 M2.2 U1.4 U3.1 | length 262.9
  Top Layer w0.3: v1@36.2,29.8 36.2,30.6 36.75,31.15 D2.1 39,37.45 K1.6 ; v1@53.2,29.9 53.2,30.6 53.75,31.15 D4.1 56.7,31.2 56.7,37.4 58.297,38.997 58.297,39.247 K2.6 ; v1(69.9,29.3) 69.9,30.6 70.45,31.15 D6.1 73.5,37.45 K3.6 ; v1(87.3,29.1) 87.3,30.7 87.75,31.15 D8.1 90.5,37.45 K4.6 ; 135.4,60 135.4,55.2 135.7,54.9 v1@136.8,54.9 ; U3.1@137.175,60 137.25,59.925 U3.1
  Top Layer w0.5: M1.1 5.635,54.695 8.947,54.695 9.447,54.195 9.447,45.695 9.947,45.195 U1.4
  Top Layer w2: 14.5,44.7 14.5,43.2 16.2,41.5 34.9,41.5 37,39.4 K1.6 K1.5 ; M2.2 135.4,60 U3.1@137.175,60
  Bottom Layer w0.3: v1(36.1,29.4) 36.15,29.45 53.05,29.45 v1(53.1,29.5) 53.1,27 53.4,26.7 69.2,26.7 69.9,27.4 v1(69.9,29.3) 69.9,30.6 70.3,31 85.4,31 v1(87.3,29.1) 90.9,32.7 110.8,32.7 111.4,33.3 111.4,48.224 111.576,48.4 136.6,48.4 137.1,48.9 v1(137.1,55)
BRAKE_REF_HIGH: R17.1 R18.2 U8.2 | length 10.4
  Top Layer w0.3: R17.1 89.525,85.95 ; R18.2 89.525,85.95 ; U8.2 89.85,86.275 89.525,85.95
CRT_REF_HIGH: R12.1 R13.2 U7.2 | length 9.1
  Top Layer w0.3: R12.1 117.525,85.975 ; R13.2 117.525,85.975 ; U7.2 117.825,86.275 117.525,85.975
CRT_REF_LOW: R14.1 R15.2 U7.5 | length 11.4
  Top Layer w0.3: U7.5 126.406,84.975 126.475,84.906 126.475,81.7 ; R14.1 126.475,81.7 ; R15.2 131.475,81.475 131.25,81.7 126.475,81.7
GND: C1.1 C2.1 C3.1 C4.1 C5.1 C6.1 C7.2 C8.1 C9.2 C10.1 C11.1 C12.1 D1.2 M2.4 pad. Q1.4 Q3.4 Q5.4 Q7.4 Q9.2 R2.2 R3.1 R4.2 R5.1 R7.2 R8.1 R9.2 R10.1 R13.1 R15.1 R18.1 R20.1 R22.1 U1.5 U1.6 U1.7 U1.8 U2.2 U3.2 U4.3 U5.2 U6.3 U7.4 U8.4 U9.4 U10.4 U11.3 U12.2 U13.3 | length 15.4
  Top Layer w0.3: U11.3 56.6,87.1 v1@56.95,87.45 ; v1(58.75,81.25) C10.1 ; v1(98.3,90.9) 98.6,91.2 105.4,91.2 105.75,90.85 C6.1 ; C4.1 v1(107.85,84.95)
  other v1: 56.9,87.5
NetC1_2: C1.2 C2.2 M2.5 R11.1 U7.3 U7.6 | length 57.8
  Top Layer w0.3: R11.1 119.75,80.2 ; v1(121.1,82.1) 120.75,81.75 C1.2 ; U7.3 119.676,85.625 119.5,85.449 119.5,80.45 119.75,80.2 ; M2.5 121.2,63 120.8,63.4 120.8,80.15 C1.2 ; U7.6 128.325,85.625 129,84.95 C2.2 131.75,86.35 v1(131.3,86.8) ; 119.75,80.2 C1.2
  Bottom Layer w0.3: v1(121.1,82.1) 121.2,82.2 121.2,86.6 121.4,86.8 v1(131.3,86.8)
NetC3_2: C3.2 C4.2 M2.6 R16.1 U8.3 U8.6 | length 67.9
  Top Layer w0.3: R16.1 91.75,80.2 ; C3.2 91.75,80.2 ; M2.6 113,60 112.5,60.5 112.5,82.75 111.8,83.45 104.5,83.45 104.25,83.7 C4.2 101.75,84.95 101.075,85.625 U8.6 U8.3 91.925,85.625 91.5,85.2 91.5,80.45 91.75,80.2
NetC12_2: C12.2 R23.2 R24.2 U12.3 | length 20.1
  Top Layer w0.3: U12.3 31.2,87.1 31.299,87.001 32.7,85.6 34.175,85.6 R24.2 36.275,85.675 36.5,85.45 36.5,82.2 ; R23.2 30.725,81.925 31,82.2 36.5,82.2 ; C12.2 36.5,80.95 36.5,82.2
NetD1_1: D1.1 R1.2 | length 19.9
  Top Layer w0.3: R1.2 27.375,35.025 27.6,34.8 D1.1
NetD2_2: D2.2 K1.1 K1.2 Q1.6 | length 35.8
  Top Layer w0.3: Q1.6 44.95,26.4 44.45,26.9 44.45,30.65 43.95,31.15 D2.2 42.2,37.4 44.2,39.4 K1.1
  Top Layer w2: K1.1 K1.2
NetD3_1: D3.1 JP1.1 Q2.3 | length 13.7
  Top Layer w0.3: JP1.1 41.2,18.4 40.7,18.9 D3.1 42.2,20.15 42.7,19.65 42.7,17.65 43.2,17.15 45.53,17.15 Q2.3
NetD3_2: D3.2 JP1.2 R3.2 | length 11
  Top Layer w0.3: JP1.2 38.66,18.36 39.1,18.8 D3.2 39.138,20.188 39.138,24.863 R3.2
NetD4_2: D4.2 K2.1 K2.2 Q3.6 | length 35.6
  Top Layer w0.3: Q3.6 62.8,26.3 62.2,26.9 62.2,30.65 61.7,31.15 D4.2 59.95,37.4 61.95,39.4 K2.1
  Top Layer w2: K2.1 K2.2
NetD5_1: D5.1 JP2.1 Q4.3 | length 12.6
  Top Layer w0.3: JP2.1 59.24,18.36 58.8,18.8 D5.1 60.45,20.15 60.95,19.65 60.95,18.15 61.45,17.65 63.11,17.65 Q4.3
NetD5_2: D5.2 JP2.2 R5.2 | length 11
  Top Layer w0.3: JP2.2 56.7,18.4 57.2,18.9 D5.2 57.188,20.162 57.188,24.887 R5.2
NetD6_2: D6.2 K3.1 K3.2 Q5.6 | length 36.6
  Top Layer w0.3: Q5.6 79.7,26.4 79.2,26.9 79.2,30.65 78.7,31.15 D6.2 76.7,37.4 78.7,39.4 K3.1
  Top Layer w2: K3.1 K3.2
NetD7_1: D7.1 JP3.1 Q6.3 | length 14
  Top Layer w0.3: JP3.1 75.95,18.4 75.55,18.8 D7.1 77.7,20.15 78.2,19.65 78.2,17.65 78.615,17.235 Q6.3
NetD7_2: D7.2 JP3.2 R8.2 | length 11.2
  Top Layer w0.3: JP3.2 73.41,18.11 73.95,18.65 D7.2 73.938,20.162 73.938,25.137 R8.2
NetD8_2: D8.2 K4.1 K4.2 Q7.6 | length 36.8
  Top Layer w0.3: Q7.6 98.05,26.595 97.995,26.65 96.7,26.65 96.45,26.9 96.45,30.65 95.95,31.15 D8.2 93.7,37.4 95.7,39.4 K4.1
  Top Layer w2: K4.1 K4.2
NetD9_1: D9.1 JP4.1 Q8.3 | length 14.3
  Top Layer w0.3: JP4.1 92.99,18.36 92.55,18.8 D9.1 94.95,20.15 95.45,19.65 95.45,17.65 95.865,17.235 Q8.3
NetD9_2: D9.2 JP4.2 R10.2 | length 11.2
  Top Layer w0.3: JP4.2 90.45,18.15 90.95,18.65 D9.2 90.937,20.163 90.937,25.137 R10.2
NetK1_3: K1.3 Q1.1 Q1.3 Q2.1 | length 59.7
  Top Layer w0.3: Q1.1 45.55,22.9 ; Q2.1 45.55,19.3 45.55,22.9 ; K1.3 48.6,59.55 v1(48.6,63.6) ; v1(49.6,31.6) 49.6,25.3 48.8,24.5 Q1.3 46.85,23.3 46.45,22.9 45.55,22.9
  Bottom Layer w0.3: v1(48.6,63.6) 52,63.6 52.7,62.9 52.7,36.3 51.9,35.5 50.2,35.5 49.6,34.9 v1(49.6,31.6)
NetK1_4: K1.4 K2.5 M1.2 TP1.1 U1.3 | length 95
  Top Layer w0.5: M1.2 9.7,57.6 10.45,56.85 10.45,46.85 10.835,46.465 U1.3 17.365,46.465 17.7,46.8 17.7,51.8 v1@18.4,52.5
  Top Layer w2: K1.4 40.95,66.65 41.7,67.4 53.2,67.4 TP1.1 53.45,54.9 53.95,54.4 K2.5
  Bottom Layer w2: v1(18.7,52.6) 36.7,52.6 37,52.9 37,58.9 37.5,59.4 K1.4
NetK2_3: K2.3 Q3.1 Q3.3 Q4.1 | length 60.4
  Top Layer w0.3: Q4.1 63.3,19.34 63.3,22.65 ; Q3.1 63.3,22.65 ; v1@65.8,63.5 65.8,59.55 K2.3 ; v1(66,28.261) 66,24.8 65.6,24.4 Q3.3 64.6,23.05 64.2,22.65 63.3,22.65
  Bottom Layer w0.3: v1(65.9,64) 69.7,64 70.3,63.4 70.3,36.5 69.5,35.7 66.476,35.7 66,35.224 v1(66,28.261)
NetK2_4: K2.4 K3.5 TP2.1 | length 36.6
  Top Layer w2: K2.4 58.45,66.15 59.45,67.15 TP2.1 70.7,54.9 71.2,54.4 K3.5
NetK3_3: K3.3 Q5.1 Q5.3 Q6.1 | length 60.1
  Top Layer w0.3: Q5.1 80.8,23.15 ; Q6.1 80.975,19.065 80.8,19.24 80.8,23.15 ; K3.3 83.1,59.55 v1@83.1,64 ; v1(85.7,34.4) 85.7,24.9 85.3,24.5 Q5.3 82.1,23.55 81.7,23.15 80.8,23.15
  Bottom Layer w0.3: v1(83.1,64.3) 86.6,64.3 87.1,63.8 87.1,36.8 85.8,35.5 85.8,34.5 v1(85.7,34.4)
NetK3_4: K3.4 K4.5 M1.3 TP3.1 U1.2 | length 145
  Top Layer w0.5: M1.3 10.95,60.6 11.45,60.1 11.45,48.1 11.815,47.735 U1.2 16.035,47.735 16.3,48 16.3,51.9 v1@15.8,52.4
  Top Layer w2: K3.4 75.45,66.65 76.2,67.4 87.45,67.4 TP3.1 87.7,54.65 88.076,54.274 92.324,54.274 K4.5
  Bottom Layer w2: v1(15.6,52.6) 15.6,65.7 16.3,66.4 74.7,66.4 75.4,65.7 75.4,59.45 K3.4
NetK4_3: K4.3 Q7.1 Q7.3 Q8.1 | length 61.3
  Top Layer w0.3: Q7.1 98.05,23.4 ; Q8.1 98.225,19.065 98.05,19.24 98.05,23.4 ; v1@99.8,63.6 99.8,59.55 K4.3 ; v1@102.7,34 102.8,33.9 102.8,25 102.45,24.65 Q7.3 99.35,23.576 99.174,23.4 98.05,23.4
  Bottom Layer w0.3: v1(99.8,64) 104.1,64 104.7,63.4 104.7,34.6 104.3,34.2 v1(102.6,34.2)
NetK4_4: K4.4 M1.4 M3.3 U1.1 U4.1 | length 215.1
  Top Layer w0.3: v1@12.45,66.15 v1(12.475,66.175) v1@12.5,66.2 ; U4.1@120.375,28.985 120.46,28.9 U4.1@120.475,28.9 ; v1@120.475,24.925 v1(120.5,24.9) ; U4.1 U4.1@120.475,28.9 ; M3.3@126.11,34.15 123.95,34.15 123.45,33.65 123.45,29.4 122.95,28.9 U4.1@120.475,28.9
  Top Layer w0.5: M1.4 11.95,63.6 12.45,63.1 12.45,49.35 12.795,49.005 U1.1